# Altium PCB STANDART_JTAG_CONNECTOR.PcbDoc
Units mm, origin at the board's own origin, x right, y up, seen from the top; angles counter-clockwise.
Board outline 71.4 x 35.81 mm, 2 copper layers (Top Layer, Bottom Layer); 19 components, 16 nets, 133 pads, 51 vias.
Unrouted connection lines stored in the file: 9.
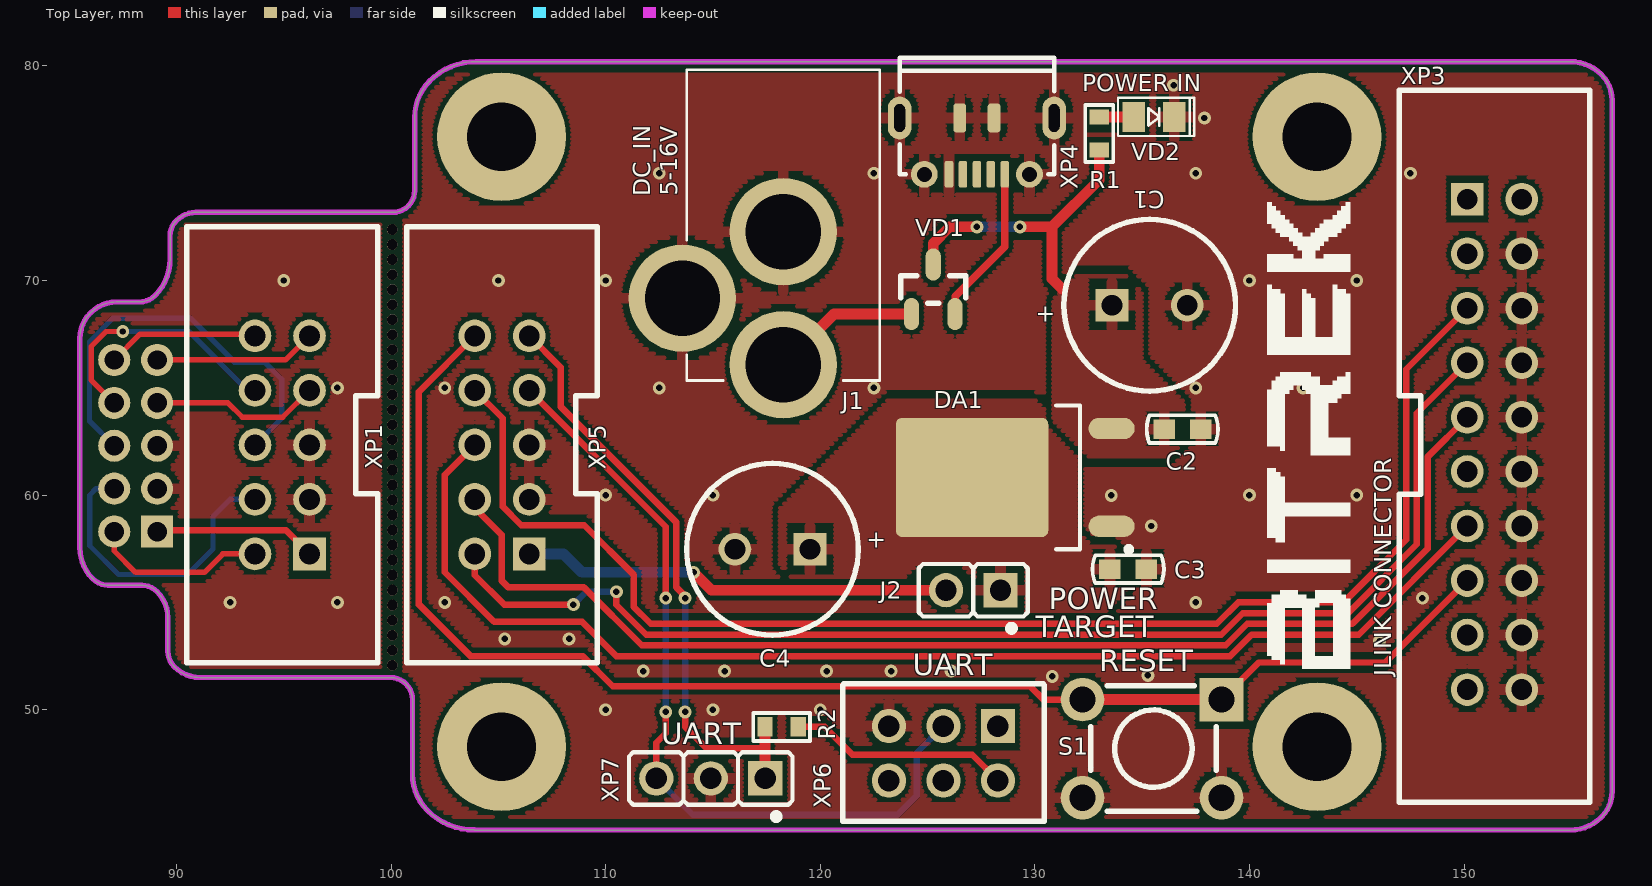
[diagram p0: Top Layer view]
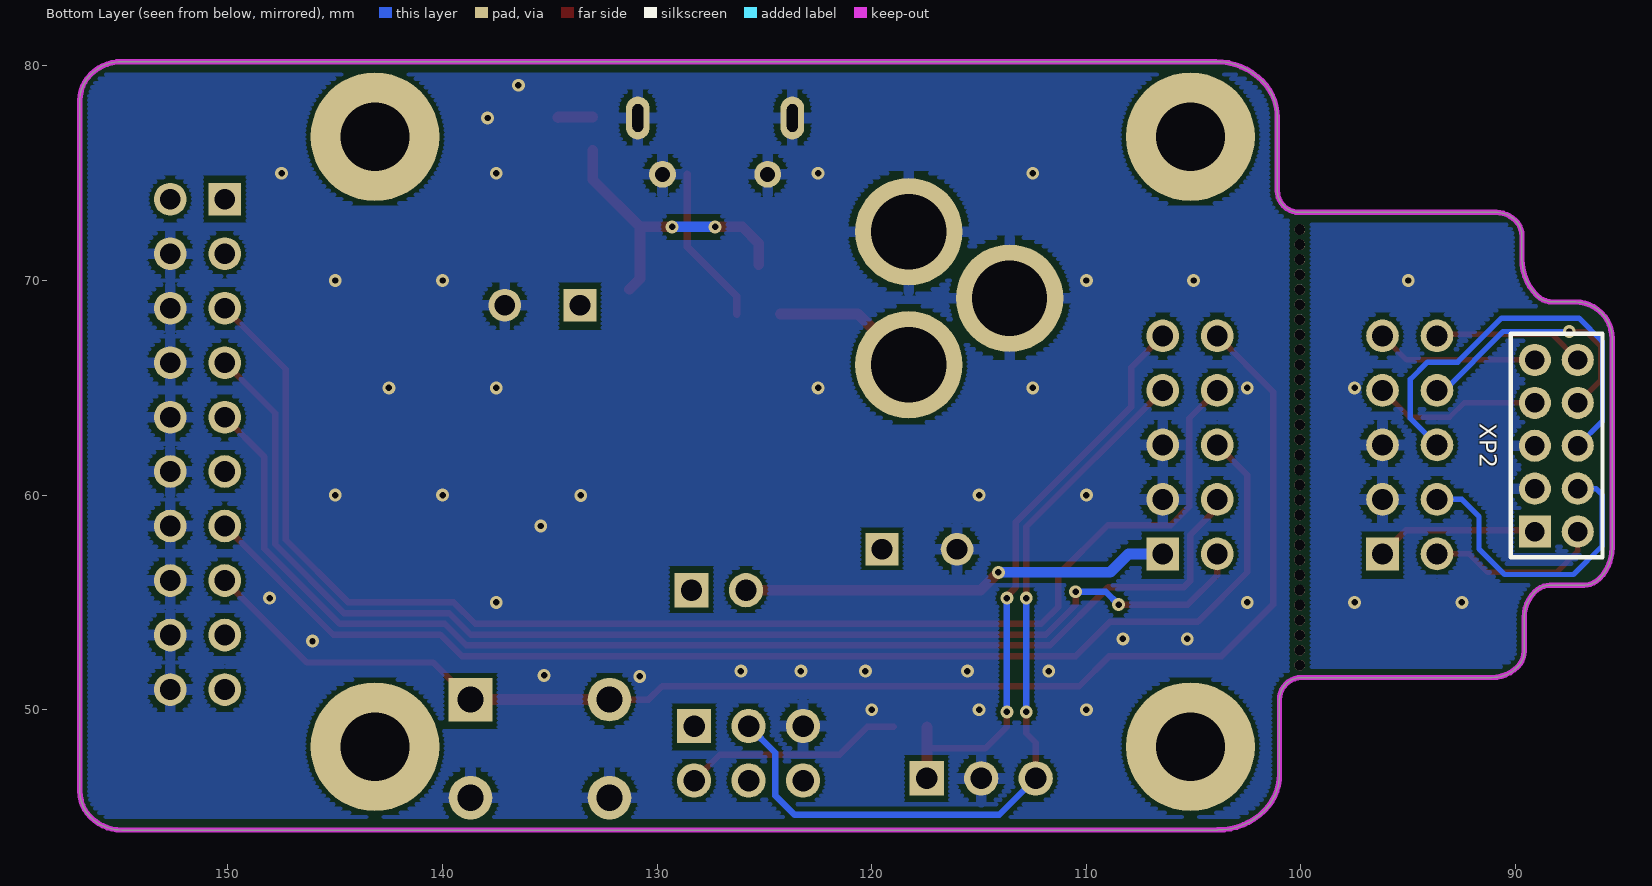
[diagram p1: Bottom Layer view, seen from below]
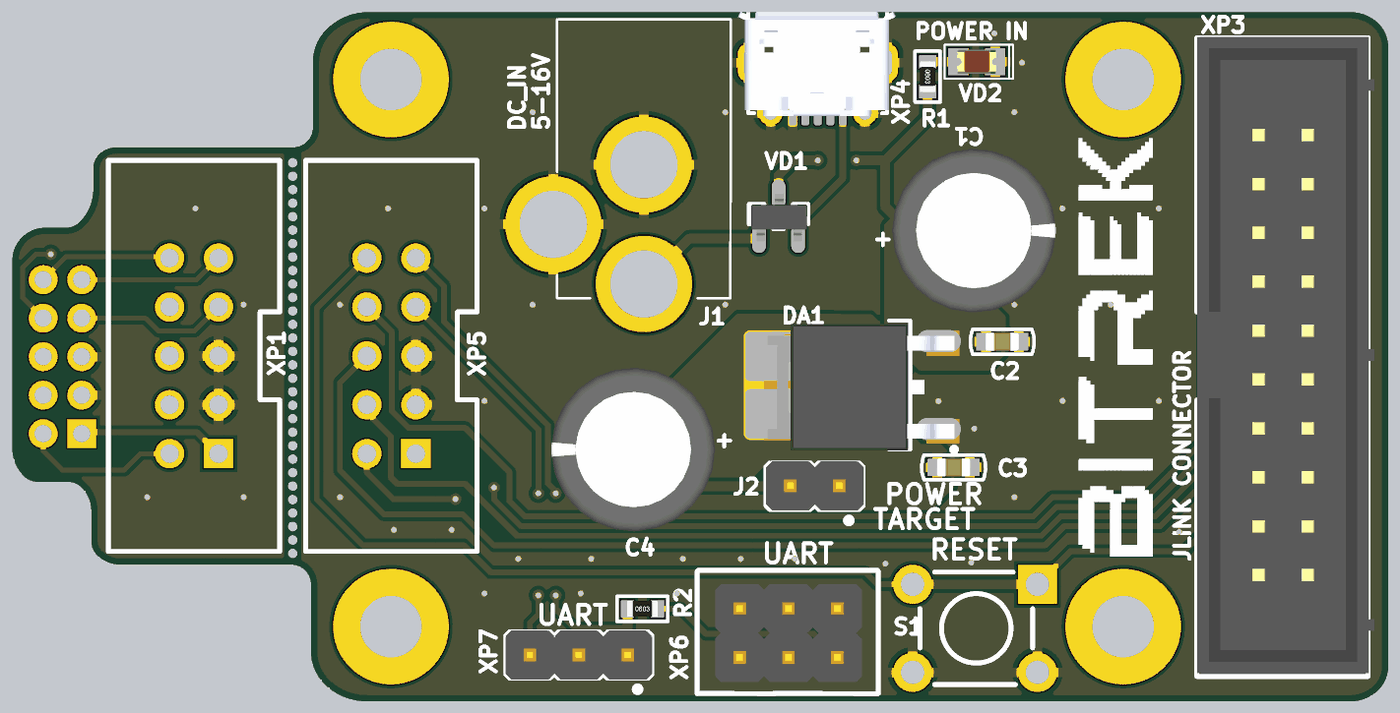
[diagram p2: 3D render of the assembled board from above, using the file's embedded part models]

## Layer stack, top to bottom
Top Solder: solder mask 0.0102, Solder Resist, Dk 3.5
Top Layer: signal copper 0.0356
Dielectric 1: dielectric 0.32, FR-4, Dk 4.8
Bottom Layer: signal copper 0.0356
Bottom Solder: solder mask 0.0102, Solder Resist, Dk 3.5

## Board outline
86.1,56.1 ccw(c86.824,56.824) 86.824,55.8 88.376,55.8 cw(c88.376,54.776) 89.1,55.5 cw(c87.893,54.293) 89.6,54.293 89.6,52.724 ccw(c90.624,52.724) 89.9,52 ccw(c91.107,53.207) 91.107,51.5 99.976,51.5 cw(c99.976,50.476) 100.7,51.2 cw(c99.976,50.476) 101,50.476 101,46.993 ccw(c103.397,46.993) 101.702,45.298 ccw(c103.87,47.466) 103.87,44.4 103.877,44.393 154.951,44.393 ccw(c154.951,46.441) 156.4,44.993 ccw(c155.193,46.2) 156.9,46.2 156.9,78.393 ccw(c155.193,78.393) 156.4,79.6 ccw(c154.951,78.151) 154.951,80.2 103.97,80.2 ccw(c103.97,77.134) 101.802,79.302 ccw(c103.497,77.607) 101.1,77.607 101.1,74.2 cw(c100.076,74.2) 100.8,73.476 cw(c100.076,74.2) 100.076,73.176 90.907,73.176 ccw(c90.907,71.893) 90,72.8 ccw(c90.724,72.076) 89.7,72.076 89.7,70.99 cw(c87.31,70.99) 89,69.3 cw(c88.276,70.024) 88.276,69 87.207,69 ccw(c87.207,67.293) 86,68.5 ccw(c87.207,67.293) 85.5,67.293 85.5,57.549 ccw(c87.549,57.549)

## Design rules (kind name [scope] priority, off if disabled: settings)
Clearance [All] p1: gap=0.2 ignorepadtopadclearanceinfootprint=FALSE
ComponentClearance [All] p1: gap=0.05 collisioncheckmode=3 verticalgap=2540 showdistances=FALSE
HoleSize [All] p1: absolutevalues=TRUE maxlimit=10 minlimit=0.025 maxpercent=80.000 minpercent=20.000
HoleToHoleClearance [All] p1: gap=0.05 allowstackedmicrovias=TRUE
MinimumSolderMaskSliver [All] p1: minsoldermaskwidth=0.05
PolygonConnect GND_DIRECT [IsVia OR InComponent('DA1')] p1: connectstyle=Direct reliefconductorwidth=0.254 reliefentries=4 polygonreliefangle="90 Angle" airgapwidth=0.254
PolygonConnect [All] p2: connectstyle=Relief reliefconductorwidth=0.5 reliefentries=4 polygonreliefangle="90 Angle" airgapwidth=0.3
RoutingVias [All] p1: holewidth=0.4 width=0.8 viastyle="Through Hole" minholewidth=0.3 minwidth=0.6 maxholewidth=0.5 maxwidth=1
SilkToSilkClearance [All] p1: silktosilkclearance=0.05
SilkToSolderMaskClearance [IsPad] p1: minsilkscreentomaskgap=0.05 clearancetoexposedcopper=TRUE
SolderMaskExpansion [All] p1: expansion=0.102
Width [All] p1: maxlimit=3 minlimit=0.2 preferedwidth=0.5
24 further rules are at their usual default settings.

## Classes and differential pairs
component class [4]-INTERFACE_BOARD: C1 C2 C3 C4 DA1 J1 J2 R1 R2 S1 VD1 VD2 XP3 XP4 XP5 XP6 XP7
component class [3]-MAIN: XP1 XP2

## Components (designator, comment, footprint, x,y, rotation, side; value= is the part's Value field where it differs from the comment)
C1 "CAP0.35" CC8X3.5 133.6,68.85 r0 top value=470uFx25V
C2 "0.1uF" CC0603 136.875,63.075 r180 top
C3 "0.1uF" CC0603 134.35,56.55 r180 top
C4 "CAP0.35" CC8X3.5 119.525,57.475 r180 top value=470uFx6.3V
DA1 "NCP1117DT33RKG" D-PAK(TO-252AA) 129.075,60.825 r180 top
J1 "DCJ25" DCJ25 113.575,69.175 r270 top
J2 "PLS-02" PLS-02 128.4,55.595 r180 top
R1 "1k" RC0603 133,76.85 r270 top
R2 "100E" RC0603 118.2,49.2 r0 top
S1 "SWT-2/5" 7906H-1 138.7,50.472 r180 top value={Value}
VD1 "BAT54C" SOT-23(123) 125.3,69.6 r270 top
VD2 "LED_0805" LED0805 135.5,77.625 r180 top
XP1 "BH-10" BH-10 96.2,57.26 r90 top
XP2 "PBD2-10" PLD2-10 89.075,58.3 r180 bottom
XP3 "BH-20" BH-20 151.425,68.69 r270 top
XP4 "KLS1-238" KLS1-238 127.325,77.5 r90 top
XP5 "BH-10" BH-10 106.44,57.26 r90 top
XP6 "PLD-06" PIN6 128.28,49.24 r180 top
XP7 "PLS03" PLS-03 117.44,46.8 r180 top

## Footprints (in the part's own frame and the unit in brackets; to place one, negate y for a bottom-side part, rotate by r counter-clockwise, add the part's x,y. Pads: shape width x height; smd on the part's side, far side on the other; paste and mask are expansions set on the pad)
7906H-1 [mil]
  rect 80x80 hole 48 mask+2.95: 1(0,0)
  round 80 hole 48 mask+2.95: 2(255,0) 3(0,180) 4(255,180)
  silkscreen extent 10,-25 240,205
BH-10 [mil] "Connector; Header; 5x2 Position"
  rect 60x60 hole 38 mask+2.95: 1(0,0)
  round 60 hole 38 mask+2.95: 2(0,100) 3(100,0) 4(100,100) 5(200,0) 6(200,100) 7(300,0) 8(300,100) 9(400,0) 10(400,100)
  silkscreen extent -200,-125 600,225
BH-20 [mil]
  rect 60x60 hole 38 mask+2.95: 1(-200.79,-50.2)
  round 60 hole 38 mask+2.95: 2(-200.79,49.8) 3(-100.79,-50.2) 4(-100.79,49.8) 5(-0.79,-50.2) 6(-0.79,49.8) 7(99.21,-50.2) 8(99.21,49.8) 9(199.21,-50.2) 10(199.21,49.8) 11(298.82,-50.2) 12(298.82,49.8) 13(398.82,-50.2) 14(398.82,49.8) 15(498.82,-50.2) 16(498.82,49.8) 17(598.82,-50.2) 18(598.82,49.8) 19(698.82,-50.2) 20(698.82,49.8)
  silkscreen extent -401,-175 906,175, body extent -403,-174 899,188, height 368
CC8X3.5 [mil]
  rect 60x60 hole 38 mask+2.95: 1(0,0)
  round 60 hole 38 mask+2.95: 2(137.8,0)
  silkscreen extent -89,-157 226,157, body extent -96,-167 238,167, height 492
CC0603 [mm]
  rect 1x0.9 smd paste-25.4 mask+0.075: 1(-0.85,0) 2(0.85,0)
  silkscreen extent -1.66,-0.65 1.66,0.65, body extent -0.87,-0.47 0.88,0.48, height 0.85
D-PAK(TO-252AA) [mm]
  oval 2.15x1 smd paste+0.076 mask+0.075: 1(-4.5,2.28) 3(-4.5,-2.28)
  rrect10% 7.1x5.55 smd paste-4 mask+0.075: 2(2,0)
  silkscreen extent -5.42,-3.35 -1.92,3.47, body extent -5.57,-3.18 4.57,3.41, height 2.3
DCJ25 [mm]
  round 5 hole 3.5: 1(-3.1,4.7) 2(0,0) 3(3.1,4.7)
  silkscreen extent -10.65,0.2 3.84,9.2
KLS1-238 [mm]
  rrect50% 1.25x0.4 smd mask+0.075: 1(-2.55,-1.275) 2(-2.55,-0.625) 3(-2.55,0.025) 4(-2.55,0.675) 5(-2.55,1.325)
  round 1.25 hole 0.7 mask+0.075: 6(-2.55,-2.425) 6(-2.55,2.475)
  oval 2x1.1 hole 0.5 slot 1.3 at 0 deg mask+0.075: 6(0.075,3.625) 6(0.075,-3.575)
  rrect50% 1.35x0.6 smd mask+0.075: 6(0.075,0.825) 6(0.075,-0.775)
  silkscreen extent -2.55,-3.57 2.87,3.63, body extent -2.7,-4.02 2.73,4.18, height 2.68
LED0805 [mm]
  rect 1.05x1.4 smd paste-25.4 mask+0.075: 1(0.9,0) 2(-1,0)
  silkscreen extent -1.93,-0.89 1.62,0.89, body extent -1.06,-0.62 0.96,0.63, height 1.1
PIN6 [mm]
  rect 1.6x1.6 hole 1 mask+0.075: 1(0,0)
  round 1.6 hole 1 mask+0.075: 2(0,2.54) 3(2.54,0) 4(2.54,2.54) 5(5.08,0) 6(5.08,2.54)
  silkscreen extent -2.16,-1.96 7.24,4.45, body extent -1.31,-1.24 6.31,3.84, height 10.1
PLD2-10 [mm]
  rect 1.5x1.5 hole 0.9 mask+0.075: 1(-0.025,0)
  round 1.5 hole 0.9 mask+0.075: 2(1.975,0) 3(-0.025,2) 4(1.975,2) 5(-0.025,4) 6(1.975,4) 7(-0.025,6) 8(1.975,6) 9(-0.025,8) 10(1.975,8)
  silkscreen extent -1.15,-1.2 3.13,9.23
PLS-02 [mm]
  rect 1.6x1.6 hole 1 mask+0.075: 1(0,0.025)
  round 1.6 hole 1 mask+0.075: 2(2.54,0.025)
  silkscreen extent -1.27,-1.2 3.81,1.95, body extent -1.29,-1.26 3.79,1.28, height 10.1
PLS-03 [mm]
  rect 1.6x1.6 hole 1 mask+0.075: 1(0,0)
  round 1.6 hole 1 mask+0.075: 2(2.54,0) 3(5.08,0)
  silkscreen extent -1.27,-1.23 6.35,1.93, body extent -1.27,-1.27 6.35,1.27, height 10.1
RC0603 [mm]
  rect 0.7x0.9 smd paste-25.4 mask+0.075: 1(-0.775,0) 2(0.774,0)
  silkscreen extent -1.32,-0.65 1.33,0.65, body extent -0.8,-0.4 0.8,0.4, height 0.45
SOT-23(123) [mm]
  oval 1.5x0.713 smd mask+0.075: 1(1.162,-1.05) 2(1.162,0.982) 3(-1.149,-0.034)
  silkscreen extent -0.62,-1.56 0.65,1.49, body extent -1.18,-1.46 1.3,1.46, height 1

## Part data
C2 C3: library part CC0603, "CC0603"
DA1: "Linear Regulator 3.3V"
R1 R2: library part RC0603, "RC0603"
S1: "Switch, Single Pole, Single Throw, Normally Open"
XP2: library part PLD2-10
XP4: library part "MicroUSB KLS1-238"
XP6: "PLD06"

## Free pads (board coordinates)
  round 0.5 hole 0.5 unplated paste-10 mask+0.102: 0(100.05,52.075) 0(100.05,52.775) 0(100.05,53.475) 0(100.05,54.175) 0(100.05,54.875) 0(100.05,55.575) 0(100.05,56.275) 0(100.05,56.975) 0(100.05,57.675) 0(100.05,58.375) 0(100.05,59.075) 0(100.05,59.775) 0(100.05,60.475) 0(100.05,61.175) 0(100.05,61.875) 0(100.05,62.575) 0(100.05,63.275) 0(100.05,63.975) 0(100.05,64.675) 0(100.05,65.375) 0(100.05,66.075) 0(100.05,66.775) 0(100.05,67.475) 0(100.05,68.175) 0(100.05,68.875) 0(100.05,69.575) 0(100.05,70.275) 0(100.05,70.975) 0(100.05,71.675) 0(100.05,72.375)
  round 6 hole 3.2 unplated mask+0.075: 0(105.15,48.275) 0(105.15,76.7) 0(143.15,48.275) 0(143.15,76.7)

## Via types
v1: diameter 0.6, hole 0.3, Top Layer to Bottom Layer, tented both sides, 51 vias

## Nets (pads, with @x,y where several pads share a name; then routed paths per layer and width w, separated by ;. In a path a pad name is that pad's centre, name@x,y a point inside that pad or via, vN(x,y) a via of type N, cw(c..) or ccw(c..) an arc to the next point about the centre after c; other vN are vias at no path point)
+3V3: J2.2 XP1.1 XP2.1 XP5.1 | length 27.8
  Top Layer w0.3: XP2.1 89.1,58.372 95.088,58.372 XP1.1
  Top Layer w0.5: v1(114.1,56.4) 114.93,55.57 J2.2
  Bottom Layer w0.5: XP5.1 108.04,57.26 108.9,56.4 v1(114.1,56.4)
BT_RX: XP1.7 XP2.7 XP5.7 XP6.3 XP7.3 | length 45.8
  Top Layer w0.25: XP2.7 92.4,64.3 93.07,63.63 94.95,63.63 XP1.7
  Top Layer w0.3: XP5.7 112.8,58.52 v1(112.8,55.2) ; XP7.3 112.36,48.46 112.8,48.9 v1(112.8,49.9)
  Bottom Layer w0.3: XP7.3 114.06,45.1 123.6,45.1 124.5,46 124.5,48 XP6.3 ; v1(112.8,49.9) v1(112.8,55.2)
BT_TX: R2.1 XP1.9 XP2.9 XP5.9 XP7.1 | length 35.3
  Top Layer w0.25: XP2.9 95.08,66.3 XP1.9
  Top Layer w0.3: XP5.9 107.9,65.96 107.9,64.127 113.3,58.727 113.3,55.7 113.7,55.3 v1(113.7,55.2) ; v1(113.7,49.9) 113.7,49.2 114.7,48.2 117.425,48.2
  Top Layer w0.5: R2.1 117.425,48.2 117.425,46.815 XP7.1
  Bottom Layer w0.3: v1(113.7,49.9) v1(113.7,55.2)
GND: C1.2 C2.1 C3.1 C4.2 DA1.1 J1.1 J1.2 S1.3 S1.4 VD2.2 XP1.3 XP1.5 XP2.3 XP2.5 XP3.4 XP3.6 XP3.8 XP3.10 XP3.12 XP3.14 XP3.16 XP3.18 XP3.20 XP4.5 XP4.6 XP5.3 XP5.5 XP6.5 XP7.2
  other v1: 110,50 115,50 120,50 130.811,51.55 135.266,51.6 111.75,51.8 115.542,51.8 120.3,51.8 123.3,51.8 126.1,51.8 146.06,53.2 105.3,53.3 108.3,53.3 92.5,55 97.5,55 102.5,55 137.5,55 148.06,55.2 135.422,58.56 110,60 115,60 133.562,59.988 140,60 145,60 97.5,65 102.5,65 112.5,65 122.5,65 137.5,65 142.5,65 95,70 105,70 110,70 140,70 145,70 112.5,75 122.5,75 137.5,75 147.5,75 137.9,77.575 136.466,79.1
JTAG_TCK: XP1.4 XP2.4 XP3.9 XP5.4 | length 71.7
  Top Layer w0.3: XP5.4 103.9,59.4 105.15,58.15 105.15,56.02 105.47,55.7 108.987,55.7 111.687,53 138.893,53 139.893,54 144.8,54 148.3,57.5 148.3,61.78 XP3.9
  Bottom Layer w0.25: XP2.4 86.25,60.3 85.959,60.009 85.959,57.641 87.3,56.3 90.507,56.3 91.7,57.493 91.7,59 92.5,59.8 XP1.4
JTAG_TDI: XP1.8 XP2.8 XP3.5 XP5.8 | length 76.9
  Top Layer w0.25: XP2.8 86.025,65.375 86.025,66.925 86.725,67.625 v1(87.5,67.625)
  Top Layer w0.3: XP5.8 105.2,63.58 105.2,59.467 106.067,58.6 109,58.6 111.3,56.3 111.3,54.801 112.101,54 138.479,54 139.479,55 144.386,55 147.3,57.914 147.3,65.86 XP3.5
  Bottom Layer w0.25: v1(87.5,67.625) 90.575,67.625 93.32,64.88 XP1.8
JTAG_TDO: XP1.6 XP2.6 XP3.13 XP5.6 | length 77.8
  Top Layer w0.3: XP5.6 102.5,60.94 102.5,56.4 104.8,54.1 108.9,54.1 110.5,52.5 139.1,52.5 140.1,53.5 145.09,53.5 XP3.13
  Bottom Layer w0.25: XP2.6 85.95,63.45 85.95,67.143 85.959,67.152 85.959,67.159 87.05,68.25 90.65,68.25 92.7,66.2 94.1,66.2 94.9,65.4 94.9,63.58 XP1.6
JTAG_TMS: XP1.2 XP2.2 XP3.7 XP5.2 | length 66.3
  Top Layer w0.25: XP2.2 87.1,57.4 88.1,56.4 91.3,56.4 92.16,57.26 XP1.2
  Top Layer w0.3: XP5.2 103.9,56.27 105.27,54.9 v1(108.5,54.9) ; v1(110.5,55.5) 110.5,54.894 111.894,53.5 138.686,53.5 139.686,54.5 144.593,54.5 147.8,57.707 147.8,63.82 XP3.7
  Bottom Layer w0.3: v1(108.5,54.9) 109.1,55.5 v1(110.5,55.5)
NetC1_1: C1.1 C2.2 DA1.3 R1.2 VD1.3 | length 14.4
  Top Layer w0.5: VD1.3 125.266,71.726 126.04,72.5 v1(127.3,72.5) ; v1(129.3,72.5) 130.8,72.5 ; 131.285,69.6 130.8,70.084 130.8,72.5 ; R1.2 133,74.7 130.8,72.5
  Bottom Layer w0.5: v1(127.3,72.5) v1(129.3,72.5)
NetC3_2: C3.2 C4.1 DA1.2 J2.1
NetJ1_3: J1.3 VD1.1 | length 7
  Top Layer w0.5: J1.3 120.638,68.438 VD1.1
NetR1_1: R1.1 VD2.1 | length 1.6
  Top Layer w0.5: R1.1 VD2.1 VD2.1@134.625,77.6
NetR2_2: R2.2 XP6.2 | length 10.3
  Top Layer w0.3: R2.2 120.2,49.2 121.5,47.9 127.08,47.9 XP6.2
NetVD1_2: VD1.2 XP4.1 | length 7.5
  Top Layer w0.35: VD1.2 126.282,69.257 128.6,71.575 XP4.1
NetXP3_1: XP3.1
RESET: S1.1 S1.2 XP1.10 XP2.10 XP3.15 XP5.10 | length 73.7
  Top Layer w0.25: XP2.10 88.3,67.5 93.58,67.5 XP1.10
  Top Layer w0.3: XP5.10 101.3,64.82 101.3,54.9 103.7,52.5 108.924,52.5 110.324,51.1 129.772,51.1 130.4,50.472 S1.2 ; S1.1 140.428,52.2 146.33,52.2 XP3.15
  Top Layer w0.5: S1.2 S1.1
pads on no net: XP3.2 XP3.3 XP3.11 XP3.17 XP3.19 XP4.2 XP4.3 XP4.4 XP6.1 XP6.4 XP6.6

## Polygon pours and split planes (outlines as drawn)
GND on Top Layer "GND_L01_P008" (hatched Horizontal grid 0.2 track 0.2, remove dead copper, pour order 8): 83.4,88.6 151.3,88.6 163.6,76.3 163.6,41.7 92.8,41.7 83.4,51.1
NetC3_2 on Top Layer "NETC3_2_L01_P006" (hatched Horizontal grid 0.2 track 0.2, remove dead copper, pour order 6): 128.05,64.425 123.15,64.425 118.1,59.375 118.1,56.725 118.725,56.1 123.875,56.1 124.45,56.675 126.625,56.675 127.2,56.1 127.2,54.8 127.6,54.4 133.125,54.4 134.275,55.55 134.275,57.05 133.675,57.65 132.648,57.65 131.95,58.348 131.95,61.925 130.45,63.425 130.45,64.075 130.375,64.075 130.05,64.4
NetC1_1 on Top Layer "NETC1_1_L01_P004" (hatched Horizontal grid 0.2 track 0.2, remove dead copper, pour order 4): 133.5,70.375 132.1,70.375 130.85,69.125 130.85,63.45 132.625,61.675 136.15,61.675 136.95,62.475 136.95,64.35 134.975,66.325 134.975,69.5 134.125,70.35
GND on Bottom Layer "GND_L02_P010" (hatched Horizontal grid 0.2 track 0.2, remove dead copper, pour order 10): 81,87.9 157.2,87.9 161.9,83.2 161.9,40.9 156.1,35.1 94.9,35.1 81.3,48.7

## Keep-outs
Keep-Out Layer:
  lines w0.25: 101.709,45.291 101.702,45.298 ; 101.802,79.302 cw(c103.97,77.134) 103.97,80.2 104.37,80.2 154.951,80.2 cw(c154.951,78.151) 156.4,79.6 cw(c155.193,78.393) 156.9,78.393 156.9,46.2 cw(c155.193,46.2) 156.4,44.993 cw(c154.951,46.441) 154.951,44.393 103.877,44.393 ; 101.802,79.302 ccw(c103.497,77.607) 101.1,77.607 101.1,74.2 cw(c100.076,74.2) 100.8,73.476 cw(c100.076,74.2) 100.076,73.176 90.966,73.176 90.907,73.176 ccw(c90.907,71.893) 90,72.8 ccw(c90.724,72.076) 89.7,72.076 89.7,71.593 89.7,70.99 cw(c87.31,70.99) 89,69.3 cw(c88.276,70.024) 88.276,69 87.207,69 ccw(c87.207,67.293) 86,68.5 ccw(c87.207,67.293) 85.5,67.293 85.5,57.7 85.5,57.549 ccw(c87.549,57.549) 86.1,56.1 ccw(c86.824,56.824) 86.824,55.8 88.376,55.8 cw(c88.376,54.776) 89.1,55.5 cw(c87.893,54.293) 89.6,54.293 89.6,54.051 89.6,52.724 ccw(c90.624,52.724) 89.9,52 ccw(c91.107,53.207) 91.107,51.5 97.63,51.5 99.976,51.5 cw(c99.976,50.476) 100.7,51.2 cw(c99.976,50.476) 101,50.476 101,48.13 101,46.993 ccw(c103.397,46.993) 101.702,45.298 ; 103.87,44.4 cw(c103.87,47.466) 101.702,45.298

## Other copper
Top Layer:
  pour cut-out: 99.5,51.5 99.5,73.176 100.6,73.176 100.6,51.5
Bottom Layer:
  pour cut-out: 99.5,51.5 99.5,73.176 100.6,73.176 100.6,51.5

## Silkscreen, mask and mechanical layers (free items; w line width, h text height)
Top Overlay:
  drawing of 6 lines, arcs and shapes, not listed
  text "POWER IN" at 132.2,78.825 h0.8
  text "5-16V" at 113.325,73.95 h0.8 r90
  text "DC_IN" at 112.075,73.925 h0.8 r90
  text "POWER" at 130.65,54.675 h1
  text "TARGET" at 130.05,53.375 h1
  text "RESET" at 133,51.8 h1
  text "UART" at 124.3,51.6 h1
  text "JLINK CONNECTOR" at 146.6,51.55 h0.8 r90
  text "UART" at 112.6,48.4 h1

## Text inside footprints (layer, text, board x,y; h text height)
C1: Top Overlay "+" at 130.05,68.075 h0.8
C4: Top Overlay "+" at 123.075,58.25 h0.8 r180